# Altium PCB Potencia.PcbDoc
Units mm, origin at the board's own origin, x right, y up, seen from the top; angles counter-clockwise.
Board outline 100 x 100 mm, 2 copper layers (Top Layer, Bottom Layer); 126 components, 44 nets, 306 pads, 42 vias.
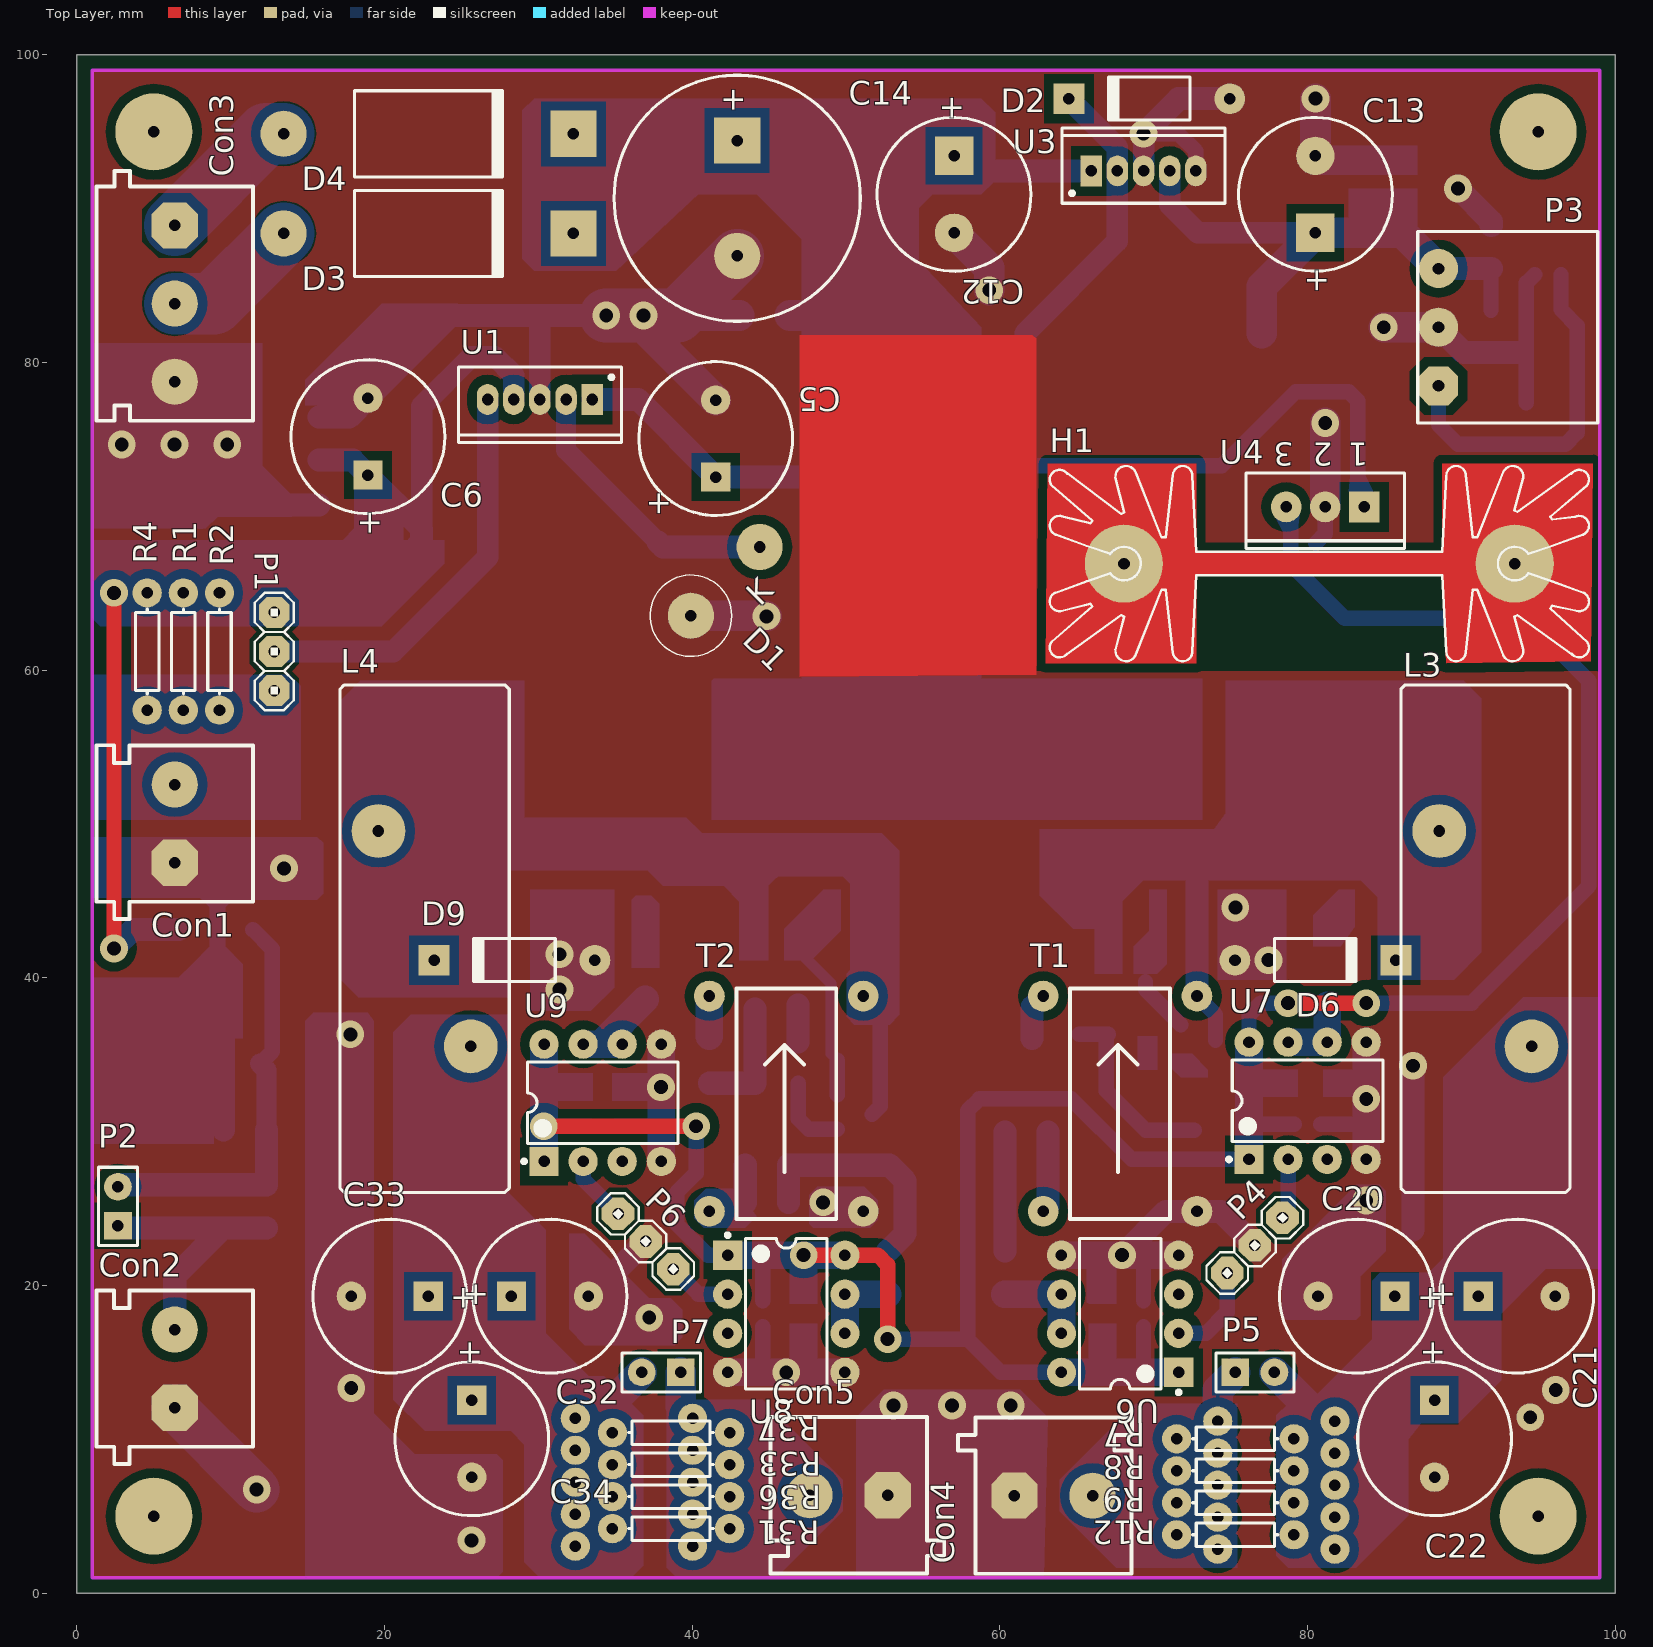
[diagram p0: Top Layer view]
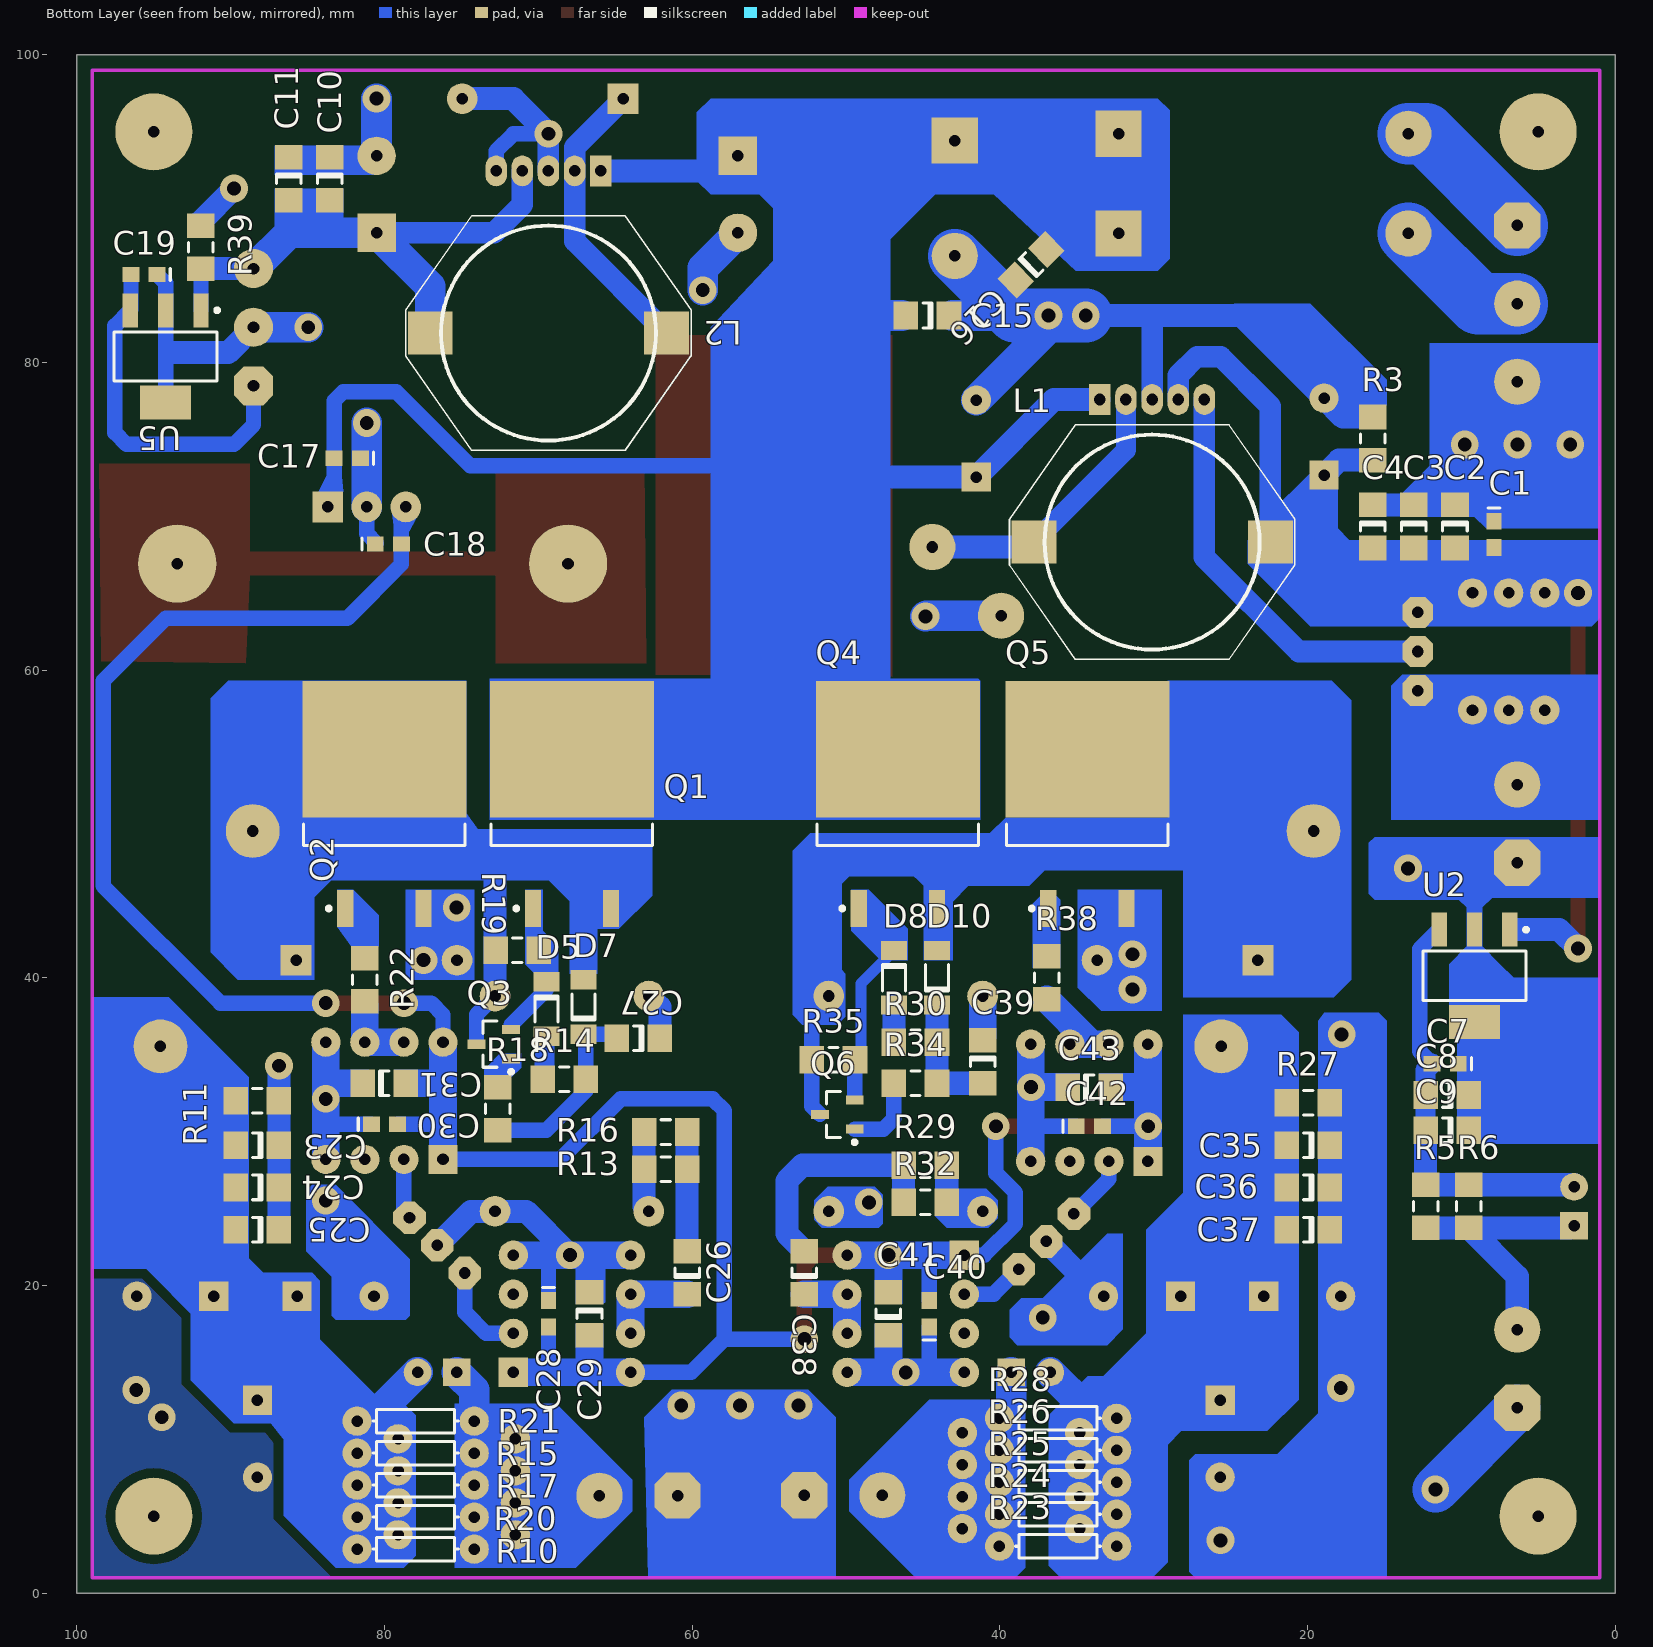
[diagram p1: Bottom Layer view, seen from below]

## Layer stack, top to bottom
Top Solder: solder mask 0.0102, Solder Resist, Dk 3.5
Top Layer: signal copper 0.0356
Dielectric 1: dielectric 0.32, FR-4, Dk 4.8
Bottom Layer: signal copper 0.0356
Bottom Solder: solder mask 0.0102, Solder Resist, Dk 3.5

## Board outline
0,0 100,0 100,100 0,100

## Design rules (kind name [scope] priority, off if disabled: settings)
Clearance "Polygon Clearance" [InPolygon AND (Not(OnLayer('Keep-Out Layer'))) vs All AND (Not(OnLayer('Keep-Out Layer')))] p1: gap=0.6
Clearance [All AND (Not(OnLayer('Keep-Out Layer'))) vs All AND (Not(OnLayer('Keep-Out Layer')))] p2: gap=0.3
ComponentClearance [All] p1 off: gap=0.5 collisioncheckmode=3 verticalgap=0.254 showdistances=TRUE
Height [All] p1: minheight=0 maxheight=80 prefheight=12.7
MinimumSolderMaskSliver SilkscreenOverComponentPads [All] p2: minsoldermaskwidth=0.254
PlaneConnect [All] p1: planeconnectstyle=Relief reliefexpansion=0.508 reliefentries=4 reliefconductorwidth=0.7 reliefairgap=0.6
PolygonConnect [All] p1: connectstyle=Direct reliefconductorwidth=1 reliefentries=4 polygonreliefangle="90 Angle" airgapwidth=0.254
RoomDefinition "5V and 3V3 Outputs" [InComponentClass('5V and 3V3 Outputs')] p1: confinementstyle=ConfineIn formatcopy=TRUE lockcomponents=FALSE outline 1,1 14.478,1 14.478,60.579 46.736,60.579 46.736,80.518 12.446,80.518 12.446,73.025 1,73.025
RoomDefinition "Variable Output 2" [InComponentClass('Variable Output 2')] p2: confinementstyle=ConfineIn formatcopy=TRUE lockcomponents=FALSE outline 14.877,1 56.66,1 56.66,80.645 46.99,80.645 46.99,60.071 14.877,60.071
RoomDefinition "Variable Output 1" [InComponentClass('Variable Output 1')] p3: confinementstyle=ConfineIn formatcopy=TRUE lockcomponents=FALSE outline 56.896,1 99,1 99,59.944 58.928,59.944 58.928,80.645 56.896,80.645
RoomDefinition Regulators [InComponentClass('Regulators')] p4: confinementstyle=ConfineIn formatcopy=TRUE lockcomponents=FALSE outline 0.889,99.187 99,99.187 99,60.198 59.309,60.198 59.309,80.832 12.065,80.832 12.065,73.237 0.889,73.237
RoutingVias [All] p1: holewidth=0.75 width=1.5 viastyle="Through Hole" minholewidth=0.75 minwidth=1.5 maxholewidth=1.25 maxwidth=3
SolderMaskExpansion [All] p1: expansion=0.102
Width [All] p1: maxlimit=8 minlimit=0.5 preferedwidth=1
27 further rules are at their usual default settings.

## Classes and differential pairs
component class "5V and 3V3 Outputs": C1 C2 C3 C4 C5 C6 C7 C8 C9 Con1 Con2 D1 L1 P1 P2 R1 R2 R3 R4 R5 R6 U1 U2
component class Regulators: C10 C11 C12 C13 C14 C15 C16 C17 C18 C19 Con3 D2 D3 D4 H1 L2 P3 R39 U3 U4 U5
component class "Variable Output 1": C20 C21 C22 C23 C24 C25 C26 C27 C28 C29 C30 C31 Con4 D5 D6 D7 L3 P4 P5 Q1 Q2 Q3 R7 R8 R9 R10 R11 R12 R13 R14 R15 R16 R17 R18 R19 R20 R21 R22 T1 U6 U7
component class "Variable Output 2": C32 C33 C34 C35 C36 C37 C38 C39 C40 C41 C42 C43 Con5 D8 D9 D10 L4 P6 P7 Q4 Q5 Q6 R23 R24 R25 R26 R27 R28 R29 R30 R31 R32 R33 R34 R35 R36 R37 R38 T2 U8 U9

## Components (designator, comment, footprint, x,y, rotation, side; value= is the part's Value field where it differs from the comment)
C1 "C0603" 0603 7.874,68.834 r270 bottom
C2 "SMD" 1206 10.414,69.342 r270 bottom
C3 "SMD" 1206 13.081,69.342 r270 bottom
C4 "SMD" 1206 15.748,69.342 r270 bottom
C5 "220uF" CAPPR5-10X16#1 41.529,75.057 r90 top
C6 "470uF HF" CAPPR5-10X20#1 18.923,75.184 r90 top
C7 "C0603" 0603 11.049,34.417 r0 bottom
C8 "SMD" 1206 10.922,32.385 r0 bottom
C9 "SMD" 1206 10.922,30.099 r0 bottom
C10 "SMD" 1206 83.566,91.948 r270 bottom
C11 "SMD" 1206 86.233,91.948 r270 bottom
C12 "220uF" CAPPR5-10X16#2 57.023,90.932 r270 top
C13 "470uF HF" CAPPR5-10X20#2 80.518,90.932 r90 top
C14 "2200uF" CAPPR7.5-16X35.5 42.926,90.678 r270 top
C15 "SMD" 1206 44.704,83.058 r0 bottom
C16 "SMD" 1206 37.973,86.36 r135 bottom
C17 "C0603" 0603 82.423,73.787 r0 bottom
C18 "C0603" 0603 79.756,68.199 r180 bottom
C19 "C0603" 0603 95.631,85.725 r0 bottom
C20 "50V" CAPPR5-10X20#1 83.185,19.304 r180 top
C21 "50V" CAPPR5-10X20#1 93.599,19.304 r0 top
C22 "50V" CAPPR5-10X20#1 88.265,10.033 r270 top
C23 "SMD" 1206 88.265,29.125 r0 bottom
C24 "SMD" 1206 88.265,26.374 r0 bottom
C25 "SMD" 1206 88.265,23.622 r0 bottom
C26 "SMD" 1206 60.325,20.828 r90 bottom
C27 "SMD" 1206 63.5,36.068 r0 bottom
C28 "C0603" 0603 69.342,18.161 r270 bottom
C29 "SMD" 1206 66.675,18.161 r270 bottom
C30 "C0603" 0603 80.01,30.48 r180 bottom
C31 "SMD" 1206 80.01,33.147 r180 bottom
C32 "50V" CAPPR5-10X20#1 30.752,19.304 r0 top
C33 "50V" CAPPR5-10X20#1 20.338,19.304 r180 top
C34 "50V" CAPPR5-10X20#1 25.672,10.033 r270 top
C35 "SMD" 1206 19.957,29.125 r0 bottom
C36 "SMD" 1206 19.957,26.374 r0 bottom
C37 "SMD" 1206 19.957,23.622 r0 bottom
C38 "SMD" 1206 52.705,20.828 r90 bottom
C39 "SMD" 1206 41.119,34.544 r270 bottom
C40 "C0603" 0603 44.595,18.161 r90 bottom
C41 "SMD" 1206 47.262,18.161 r90 bottom
C42 "C0603" 0603 34.181,30.353 r180 bottom
C43 "SMD" 1206 34.181,32.893 r180 bottom
Con1 "Salida Buck" My_CN2 1.27,44.958 r90 top
Con2 "Salida Buck" My_CN2 1.27,9.525 r90 top
Con3 "AC Input" My_CN3 11.455,91.44 r270 top
Con4 "Salida Buck" My_CN2 58.42,11.43 r0 top
Con5 "Salida Buck" My_CN2 55.245,1.27 r180 top
D1 "1N5822" "Vertical DO-201AD" 41.91,65.532 r45 top
D2 "1N5817" DO-41 69.723,97.155 r180 top
D3 "1N5408" DO-201AD 22.86,88.392 r0 top
D4 "1N5408" DO-201AD 22.86,94.869 r0 top
D5 "1N4148" SOD80C 69.469,37.973 r90 bottom
D6 "1N4937" DO-41 80.518,41.148 r0 top
D7 "1N4148" SOD80C 67.056,38.1 r270 bottom
D8 "1N4148" SOD80C 46.881,40.005 r90 bottom
D9 "1N4937" DO-41 28.448,41.148 r180 top
D10 "1N4148" SOD80C 44.087,40.005 r270 bottom
H1 "Heat sink TO22" My_Heat_sink_TO22 80.772,66.167 r180 top
L1 "SMTDR1206" "SMTDR1206 Inductor" 30.099,68.326 r180 bottom
L2 "SMTDR1206" "SMTDR1206 Inductor" 69.342,81.915 r0 bottom
L3 "Inductor" "R33x19x11 Toroid Vertical" 91.567,42.545 r270 top
L4 "Inductor" "R33x19x11 Toroid Vertical" 22.606,42.545 r270 top
P1 "Header 3" My_1X03 12.827,61.214 r90 top
P2 "Header 2" HDR1X2 2.667,23.876 r90 top
P3 "XY2500R-F 3P" "XY2500R-F 3P" 88.519,82.296 r90 top
P4 "Header 3" My_1X03 76.581,22.606 r45 top
P5 "Header 2" HDR1X2 75.311,14.351 r0 top
P6 "Header 3" My_1X03 36.975,22.86 r135 top
P7 "Header 2" HDR1X2 39.261,14.351 r180 top
Q1 "IRF540NS" D2PAK_N 67.818,51.308 r90 bottom
Q2 "IRF540NS" D2PAK_N 80.01,51.308 r90 bottom
Q3 "BC807-25" SOT-23A_N 72.898,35.687 r0 bottom
Q4 "IRF540NS" D2PAK_N 46.627,51.308 r90 bottom
Q5 "IRF540NS" D2PAK_N 34.308,51.308 r90 bottom
Q6 "BC807-25" SOT-23A_N 50.564,31.115 r0 bottom
R1 "Carbon" AXIAL-0.3 6.921,61.214 r270 top
R2 "Carbon" AXIAL-0.3 9.271,61.214 r270 top
R3 "SMD" 8RB-1206 15.748,75.057 r270 bottom
R4 "Carbon" AXIAL-0.3 4.572,61.214 r270 top
R5 "SMD" 8RB-1206 12.319,25.146 r270 bottom
R6 "SMD" 8RB-1206 9.525,25.146 r270 bottom
R7 "Carbon" AXIAL-0.3 75.311,10.033 r180 top
R8 "Carbon" AXIAL-0.3 75.311,7.953 r180 top
R9 "Carbon" AXIAL-0.3 75.311,5.874 r180 top
R10 "Carbon" AXIAL-0.3 77.978,2.857 r180 bottom
R11 "SMD" 8RB-1206 88.265,32.004 r0 bottom
R12 "Carbon" AXIAL-0.3 75.311,3.794 r180 top
R13 "SMD 1206" 8RB-1206 61.722,27.559 r0 bottom
R14 "SMD 1206" 8RB-1206 68.326,33.401 r0 bottom
R15 "Carbon" AXIAL-0.3 77.978,9.096 r180 bottom
R16 "SMD 1206" 8RB-1206 61.722,29.972 r0 bottom
R17 "Carbon" AXIAL-0.3 77.978,7.017 r180 bottom
R18 "SMD" 8RB-1206 72.644,31.496 r270 bottom
R19 "SMD" 8RB-1206 71.374,41.783 r180 bottom
R20 "Carbon" AXIAL-0.3 77.978,4.937 r180 bottom
R21 "Carbon" AXIAL-0.3 77.978,11.176 r180 bottom
R22 "SMD 1206" 8RB-1206 81.28,39.878 r270 bottom
R23 "Carbon" AXIAL-0.3 36.213,3.048 r0 bottom
R24 "Carbon" AXIAL-0.3 36.213,5.128 r0 bottom
R25 "Carbon" AXIAL-0.3 36.213,7.207 r0 bottom
R26 "Carbon" AXIAL-0.3 36.213,9.287 r0 bottom
R27 "SMD" 8RB-1206 19.957,31.877 r0 bottom
R28 "Carbon" AXIAL-0.3 36.213,11.367 r0 bottom
R29 "SMD 1206" 8RB-1206 44.849,27.813 r180 bottom
R30 "SMD 1206" 8RB-1206 45.484,35.814 r0 bottom
R31 "Carbon" AXIAL-0.3 38.626,4.191 r0 top
R32 "SMD 1206" 8RB-1206 44.849,25.4 r180 bottom
R33 "Carbon" AXIAL-0.3 38.626,8.35 r0 top
R34 "SMD" 8RB-1206 45.484,33.147 r180 bottom
R35 "SMD" 8RB-1206 50.818,34.671 r180 bottom
R36 "Carbon" AXIAL-0.3 38.626,6.271 r0 top
R37 "Carbon" AXIAL-0.3 38.626,10.43 r0 top
R38 "SMD 1206" 8RB-1206 36.957,40.005 r270 bottom
R39 "SMD" 8RB-1206 91.948,87.503 r270 bottom
T1 "Gate Driver Transformer 15mm Toroidal" "Gate Driver Transformer 15mm Toroidal" 67.662,31.242 r90 top
T2 "Gate Driver Transformer 15mm Toroidal" "Gate Driver Transformer 15mm Toroidal" 45.963,31.242 r90 top
U1 "LM2576T-5.0" T05A 30.099,77.597 r180 top
U2 "TC1262-3.3VDB" SOT-223-DB3_N 9.144,40.132 r270 bottom
U3 "LM2575T-5.0" T05A 69.342,92.456 r0 top
U4 "MC7815ACT" 221A-04 81.153,70.612 r180 top
U5 "TC1262-3.3VDB" SOT-223-DB3_N 94.234,80.391 r270 bottom
U6 "MCP1407-E/P" PDIP300-P8 67.818,18.161 r180 top
U7 "MCP1407-E/P" PDIP300-P8 80.01,32.004 r90 top
U8 "MCP1407-E/P" PDIP300-P8 46.119,18.161 r0 top
U9 "MCP1407-E/P" PDIP300-P8 34.181,31.877 r90 top

## Footprints (in the part's own frame and the unit in brackets; to place one, negate y for a bottom-side part, rotate by r counter-clockwise, add the part's x,y. Pads: shape width x height; smd on the part's side, far side on the other; paste and mask are expansions set on the pad)
8RB-1206 [mm] "Chip Resistor; Body 3.2 x 1.6 mm (LxW typ)"
  rect 1.6x1.8 smd: 1(-1.4,0) 2(1.4,0)
  silkscreen extent -0.3,-0.8 0.3,0.8
221A-04 [mm] "TO, Thru-Hole, Vertical, Heatsink Mounted; 3 In-Line Leads; Pitch 2.54 mm"
  rect 2x2 hole 0.75: 1(-2.54,0)
  round 2 hole 0.75: 2(0,0) 3(2.54,0)
  silkscreen extent -5.15,-2.2 5.15,2.7
0603 [mm] "Chip Capacitor; Body 1.6 x 0.8 mm (LxW typ)"
  rect 1.1x1 smd: 1(-0.85,0) 2(0.85,0)
  silkscreen extent -1.7,-0.4 -1.7,0.4
1206 [mm] "Chip Capacitor; Body 3.2 x 1.6 mm (LxW typ)"
  rect 1.6x1.8 smd: 1(-1.4,0) 2(1.4,0)
  silkscreen extent -0.3,-0.8 0.3,0.8
AXIAL-0.3 [mm] "Axial Device, Thru-Hole; 2 Leads; 0.3 in Pin Spacing"
  round 1.9 hole 0.75: 1(-3.81,0) 2(3.81,0)
  silkscreen extent -2.77,-0.76 2.77,0.76
CAPPR5-10X16#1 [mm] "Capacitor, Electrolytic, Radial; Body 10 x 16 mm (Dia.xH typ); Pin Spacing 5 mm (typ)"
  rect 1.9x1.9 hole 0.75: 1(-2.5,0)
  round 1.9 hole 0.75: 2(2.5,0)
  silkscreen extent -5,-5 5,5
CAPPR5-10X16#2 [mm] "Capacitor, Electrolytic, Radial; Body 10 x 16 mm (Dia.xH typ); Pin Spacing 5 mm (typ)"
  rect 2.5x2.5 hole 0.75: 1(-2.5,0)
  round 2.5 hole 0.75: 2(2.5,0)
  silkscreen extent -5,-5 5,5
CAPPR5-10X20#1 [mm] "Capacitor, Electrolytic, Radial; Body 10 x 20 mm (Dia.xH typ); Pin Spacing 5 mm (typ)"
  rect 1.9x1.9 hole 0.75: 1(-2.5,0)
  round 1.9 hole 0.75: 2(2.5,0)
  silkscreen extent -5,-5 5,5
CAPPR5-10X20#2 [mm] "Capacitor, Electrolytic, Radial; Body 10 x 20 mm (Dia.xH typ); Pin Spacing 5 mm (typ)"
  rect 2.5x2.5 hole 0.75: 1(-2.5,0)
  round 2.5 hole 0.75: 2(2.5,0)
  silkscreen extent -5,-5 5,5
CAPPR7.5-16X35.5 [mm] "Capacitor, Electrolytic, Radial; Body 16 x 35.5 mm (Dia.xH typ); Pin Spacing 7.5 mm (typ)"
  rect 3x3 hole 0.75: 1(-3.75,0)
  round 3 hole 0.75: 2(3.75,0)
  silkscreen extent -8,-8 8,8
D2PAK_N [mm] "D2-PAK, 4-Leads, Body 8.8x10.4mm, Pitch 2.54mm, Lead Span 15.1mm, IPC Medium Density"
  rect 2.4x1.05 smd: 1(-6.8,2.54) 3(-6.8,-2.54)
  rect 8.9x10.65 smd: 2(3.55,0)
  silkscreen extent -6.92,-5.25 -1.3,5.25, body extent -2.7,-5.28 6.3,5.28, height 4.69
DO-41 [mm] "Diode, Axial; Body 5.2 x 2.7 mm (LxDia. max), Lead Dia. 0.86 mm (max)"
  round 2 hole 0.75: 1(-5.23,0)
  rect 2x2 hole 0.75: 2(5.23,0)
  silkscreen extent -2.65,-1.4 2.75,1.4
DO-201AD [mm] "Diode, Axial; Body 9.5 x 5.6 mm (LxDia. max), Lead Dia. 1.32 mm (max)"
  round 3 hole 0.75: 1(-9.42,0)
  rect 3x3 hole 0.75: 2(9.42,0)
  silkscreen extent -4.8,-2.8 4.9,2.8
"Gate Driver Transformer 15mm Toroidal" [mm] "Gate Driver Transformer 15mm Toroidal"
  round 2 hole 0.75: 1(-6.424,4.844) 2(-6.424,-5.156) 3(7.576,4.844) 4(7.576,-5.156)
  silkscreen extent -6.92,-3.41 8.08,3.09
HDR1X2 [mm] "Connector; Header; 2 Position"
  rect 1.8x1.8 hole 0.75: 1(0,0)
  round 1.8 hole 0.75: 2(2.54,0)
  silkscreen extent -1.27,-1.27 3.81,1.27
My_1X03 [mm]
  oct 2x2 hole 0.75: 1(-2.54,0) 2(0,0) 3(2.54,0)
  silkscreen extent -3.81,-1.27 3.81,1.27
My_CN2 [mm]
  oct 3x3 hole 0.75: 1(2.527,-5.093)
  round 3 hole 0.75: 2(7.607,-5.093)
  silkscreen extent -1.14,-10.17 10.16,-0.01
My_CN3 [mm]
  oct 3x3 hole 0.75: 1(2.527,-5.093)
  round 3 hole 0.75: 2(7.607,-5.093) 3(12.687,-5.093)
  silkscreen extent -1.02,-10.17 15.23,-0.01
My_Heat_sink_TO22 [mm]
  round 5.08 hole 0.75: A2,5(-12.7,-0.762) B2,5(12.7,-0.762)
  Top Layer region: 17.78,5.715 8.001,5.715 8.001,0 -8.001,0 -8.255,5.715 -17.653,5.588 -17.78,-7.239 -8.001,-7.239 -8.001,-1.524 8.001,-1.524 8.001,-7.239 17.653,-7.239
  silkscreen extent -17.53,-7.11 17.53,5.59
PDIP300-P8 [mm] "DIP, 8-Leads, Row Spacing 7.62mm, Pitch 2.54mm, Body 9.5x6.6mm"
  rect 1.9x1.9 hole 0.75: 1(-3.81,3.81)
  round 1.9 hole 0.75: 2(-3.81,1.27) 3(-3.81,-1.27) 4(-3.81,-3.81) 5(3.81,-3.81) 6(3.81,-1.27) 7(3.81,1.27) 8(3.81,3.81)
  silkscreen extent -3.94,-4.9 2.65,5.23, body extent -3.55,-4.9 3.55,4.9, height 5.34
"R33x19x11 Toroid Vertical" [mm] "R33x19x11 Toroid Vertical"
  round 3.5 hole 0.75: 1(-7,-3) 2(7,3)
  silkscreen extent -16.5,-5.5 16.5,5.5
"SMTDR1206 Inductor" [mm] "SMTDR1206 Inductor"
  rect 2.92x2.79 smd: 1(-7.685,0) 2(7.685,0)
  silkscreen extent -9.27,-7.62 9.27,7.62
SOD80C [mm] "Metal Electrode Face (MELF) Diode; Body 3.5 x 1.6 mm (LxDia)"
  rect 1.25x1.7 smd: 1(-1.775,0) 2(1.775,0)
  silkscreen extent -0.85,-0.75 0.85,0.75
SOT-23A_N [mm] "SOT23, 3-Leads, Body 2.9x1.3mm, Pitch 0.95mm, Lead Span 2.3mm, IPC Medium Density"
  rect 1.15x0.6 smd: 1(-1.125,0.95) 2(-1.125,-0.95) 3(1.125,0)
  silkscreen extent -1.25,-1.5 0.7,1.92, body extent -0.7,-1.5 0.7,1.5, height 1.09
SOT-223-DB3_N [mm] "SOT223, 4-Leads, Body 6.5x3.5mm, Pitch 2.3mm, Lead Span 7mm, IPC Medium Density"
  rect 2.2x1 smd: 1(-3,2.3) 2(-3,0) 3(-3,-2.3)
  rect 2.2x3.3 smd: 4(3,0)
  silkscreen extent -3.12,-3.35 1.6,3.47, body extent -1.85,-3.35 1.85,3.35, height 1.8
T05A [mm] "TO, Thru-Hole, Vertical, Heatsink Mounted; 5 In-Line Leads; Pitch 1.70 mm"
  rect 1.4x2 hole 0.75: 1(-3.4,0)
  oval 1.4x2 hole 0.75: 2(-1.7,0) 3(0,0) 4(1.7,0) 5(3.4,0)
  silkscreen extent -5.3,-2.1 5.3,2.8, body extent -5.35,-2.15 5.35,2.85, height 19.6
"Vertical DO-201AD" [mm] "Vertical DO-201AD"
  round 3 hole 0.75: 1(-2.816,0) 2(3.5,0)
  silkscreen extent -5.47,-2.65 -0.17,2.65
"XY2500R-F 3P" [mm] "XY2500R-F 3P"
  oct 2.54x2.54 hole 0.75: 1(-3.81,0)
  round 2.54 hole 0.75: 2(0,0) 3(3.81,0)
  silkscreen extent -6.21,-10.35 6.21,1.35

## Part data
C1 C7 C17 C18 C19 C28 C30 C40 C42: "C1608X7R1C105K X7R"
C2 C3 C4 C8 C9 C10 C11 C15 C16 C23 C24 C25 C26 C27 C29 C31 C35 C36 C37 C38 C39 C41 C43: library part C1206, "Ceramic Chip Capacitor - Standard"
C5 C12: library part EKA00DD322J00, "Aluminum Electrolytic Capacitor, Radial Style with Long Leads: 220uF, 63V"
C6 C13: library part EKC00DE347E00, "Aluminum Electrolytic Capacitor, Radial Style with Long Leads: 470uF, 25V"
C14: library part EKA00JL422H00, "Aluminum Electrolytic Capacitor, Radial Style with Long Leads: 2200uF, 50V"
C20 C21 C22 C32 C33 C34: library part EKB00DE347H00, "Aluminum Electrolytic Capacitor, Radial Style with Long Leads: 470uF, 50V"
Con1 Con2 Con4 Con5: library part "CON2 pin blue", "Connector blue screw"
Con3: library part "CON3 pin Green", "Connector green screw"
D1: library part "Generic Schottky Diode", "Generic Schottky Diode"
D2: library part 1N6095, "Schottky Rectifier"
D3 D4: library part "Diode 1N5408", "3 Amp Medium Power Silicon Rectifier Diode"
D5 D7 D8 D10: "High Conductance Fast Diode"
D6 D9: library part "Diode 1N4001", "1 Amp General Purpose Rectifier"
H1: "Heat sink for TO22"
L1 L2: library part "100UHY SMD 18.54X7.11MM 20% 3A 0.19E SMTDR1206-101M", "100UHY SMD 18.54X7.11MM 20% 3A 0.19E SMTDR1206-101M"
L3 L4: library part "Generic Inductor", "Generic Inductor"
P1 P4 P6: "Header, 3-Pin"
P2 P5 P7: "Header, 2-Pin"
P3: "HEADER 3P P/CI 90gra VERDE P=3.81MM XY2500R-F"
Q1 Q2 Q4 Q5: "HEXFET Power MOSFET"
Q3 Q6: "PNP General Purpose Amplifier"
R1 R2 R4 R7 R8 R9 R10 R12 R15 R17 R20 R21 R23 R24 R25 R26 R28 R31 R33 R36 R37: library part Res1, "Resistor"
R3 R5 R6 R11 R13 R14 R16 R18 R19 R22 R27 R29 R30 R32 R34 R35 R38 R39: library part ERJ8BQ, "Low Ohmic Value Thick Film Chip Resistor, 0.22 Ohm to 9.1 Ohm Range, 1%, 2% and 5% Tolerance, 1206 Size, 0.33 W"
U1: "SIMPLE SWITCHER® 3A Step-Down Voltage Regulator, 5-pin TO-220"
U2 U5: "500mA Fixed Output CMOS LDO, 3-Pin SOT-223, Extended Temperature"
U3: "SIMPLE SWITCHER® 1A Step-Down Voltage Regulator, 5-pin TO-220"
U4: "3-Terminal Positive Fixed Voltage Regulator"
U6 U7 U8 U9: "6A High-Speed Power MOSFET Drivers, Non Inverting, Extended Temperature"

## Free pads (board coordinates)
  round 5 hole 0.75: 0(5,5) 0(5,95) 0(95,5) 0(95,95)

## Via types
v1: diameter 1.8, hole 0.9, Top Layer to Bottom Layer, 42 vias

## Nets (pads, with @x,y where several pads share a name; then routed paths per layer and width w, separated by ;. In a path a pad name is that pad's centre, name@x,y a point inside that pad or via, vN(x,y) a via of type N, cw(c..) or ccw(c..) an arc to the next point about the centre after c; other vN are vias at no path point)
3V3_SENSE_NEG: Con2.2 P2.1 R5.2 R6.2 | length 17.7
  Bottom Layer w1.5: P2.1@2.667,24.003 2.924,23.746 R6.2 ; Con2.2 6.363,20.584 R6.2 ; R5.2 R6.2
3V3_SENSE_POS: C7.2 C8.2 C9.2 P2.2 R5.1 R6.1 U2.3 | length 27.3
  Bottom Layer w1: U2.3 12.7,41.876 12.7,35.218 C7.2
  Bottom Layer w1.3: C7.2 12.322,33.994 C8.2 C9.2
  Bottom Layer w1.5: P2.2@2.667,26.543 2.67,26.546 R6.1 R5.1 12.322,26.549 C9.2
5V_CTRL: P1.2 U1.5 | length 26.7
  Bottom Layer w1.4: P1.2 20.574,61.214 26.699,67.339 U1.5
5V_SENSE_NEG: Con1.2 P1.1 R1.2 R2.2 R4.2
5V_SENSE_POS: C1.2 C2.2 C3.2 C4.2 C6.1 L1.2 P1.3 R1.1 R2.1 R3.2 R4.1 U1.4 U2.1 | length 55
  Top Layer w1: v1(2.413,41.91) v1(2.413,65.024)
  Bottom Layer w1.4: L1.2@22.414,69.193 22.414,77.151 25.654,80.391 27.178,80.391 28.399,79.17 U1.4
  Bottom Layer w1.5: v1(2.413,41.91) 3.635,43.132 U2.1@6.604,43.132 ; R3.2 17.95,73.657 C6.1 22.414,69.193 L1.2 L1.2@22.072,67.984
+3V3: C19.2 P3.1 U5.3 | length 23
  Bottom Layer w1: P3.1 88.519,75.946 89.789,74.676 96.774,74.676 97.536,75.438 97.536,82.389 U5.3 ; U5.3@96.481,83.444 C19.2
+5V: C10.2 C11.2 C13.1 L2.2 P3.3 R39.2 U3.4 U5.1 | length 36.3
  Bottom Layer w1: U5.1 R39.2@91.934,86.089
  Bottom Layer w1.4: U3.4 71.042,90.248 72.858,88.432 C13.1@80.01,88.432 ; C13.1@79.97,88.392 C13.1@80.01,88.432 ; C13.1 C13.1@80.01,88.432 ; C13.1@80.518,88.94 C13.1@80.01,88.432
  Bottom Layer w1.5: P3.3@88.522,86.103 R39.2
  Bottom Layer w2: L2.2 77.027,84.941 C13.1 86.193,88.432 P3.3
+15V: C18.2 C28.2 C29.2 C30.2 C31.2 C40.2 C41.2 C42.2 C43.2 U4.3 U6.1 U6.8 U7.1 U7.8 U8.1 U8.8 U9.1 U9.8 | length 187.5
  Top Layer w1: v1(30.353,30.353) v1(40.259,30.353) ; v1(47.244,21.971) U8.8 52.07,21.971 52.705,21.336 v1(52.705,16.51) ; v1(78.74,38.354) v1(83.82,38.354)
  Bottom Layer w1: v1@30.625,30.353 C42.2 ; v1(40.259,30.353) 40.259,27.305 38.989,26.035 38.989,24.003 41.021,21.971 U8.1 ; C40.2 44.595,21.953 ; v1(52.705,16.51) 57.912,16.51 ; U6.8 60.071,14.351 57.912,16.51 ; 69.342,14.351 C28.2 ; U7.1 68.58,28.194 64.643,32.131 58.674,32.131 57.912,31.369 57.912,16.51 ; U7.8 76.2,37.592 76.962,38.354 v1(78.74,38.354) ; 76.454,30.48 C30.2 ; U4.3 78.906,70.319 C18.2@78.906,68.326 ; C18.2 78.906,66.89 82.423,63.373 94.234,63.373 98.298,59.309 98.298,45.974 90.678,38.354 v1(83.82,38.354)
  Bottom Layer w1.8: U9.1 U9.8 ; U8.1 v1(47.244,21.971) U8.8 ; U6.8 69.342,14.351 U6.1 ; U7.1 U7.8
+30V: C5.1 C12.1 C14.1 C15.2 C16.2 C17.2 D3.2 D4.2 Q1.2 Q4.2 U1.1 U3.1 U4.1 | length 60.1
  Bottom Layer w1: 57.277,73.279 74.422,73.279 79.248,78.105 82.677,78.105 83.273,77.509 C17.2 U4.1@83.273,71.032
  Bottom Layer w1.5: U1.1@33.549,77.597 36.489,77.597 C5.1 47.792,72.557 48.006,72.771 ; 58.674,92.456 U3.1@65.659,92.456
  Bottom Layer w2: C15.2@46.355,83.058 48.133,83.058
GATE1_BUCK1_PIC: P4.1 U6.2 | length 6.3
  Bottom Layer w1: U6.2 73.406,16.891 74.785,18.27 P4.1
GATE1_BUCK2_PIC: P6.1 U8.2 | length 4.2
  Bottom Layer w1: P6.1 40.404,19.431 U8.2
GATE2_BUCK1_PIC: P4.3 U7.2 | length 3.4
  Bottom Layer w1: P4.3@78.74,24.765 U7.2
GATE2_BUCK2_PIC: P6.3 U9.2 | length 4.4
  Bottom Layer w1: U9.2 32.911,26.924 P6.3
GND: C1.1 C2.1 C3.1 C4.1 C5.2 C6.2 C7.1 C8.1 C9.1 C10.1 C11.1 C12.2 C13.2 C14.2 C15.1 C16.1 C17.1 C18.1 C19.1 C20.2 C21.2 C22.2 C23.1 C24.1 C25.1 C28.1 C29.1 C30.1 C31.1 C32.2 C33.2 C34.2 C35.1 C36.1 C37.1 C40.1 C41.1 C42.1 C43.1 Con1.1 Con2.1 Con3.3 Con4.1 Con5.1 D1.1 D2.1 D6.1 D9.1 P3.2 P4.2 P6.2 Q2.3 Q5.3 R3.1 R11.1 R27.1 R39.1 T1.2 T2.2 U1.3 U2.2 U2.4 U3.3 U3.5 U4.2 U5.2 U5.4 U6.4 U6.5 U7.4 U7.5 U8.4 U8.5 U9.4 U9.5 | length 193.7
  Bottom Layer w1: C42.1 37.737,30.353 ; 44.595,14.369 C40.1 ; C28.1 69.342,21.844 ; v1(69.342,94.869) 71.628,94.869 72.742,93.755 U3.5 ; C18.1@80.542,68.263 81.153,68.873 U4.2 ; C30.1 83.693,30.48 ; U5.4 U5.2 94.234,85.178 C19.1
  Bottom Layer w1.4: U1.3 30.099,82.804 ; U3.3 v1(69.342,94.869)
  Bottom Layer w1.5: C1.1@8.034,69.944 8.832,70.742 C2.1 C3.1 C4.1 ; U2.4 9.522,36.754 C8.1 C9.1 ; R3.1 17.696,76.457 C6.2 24.297,83.058 v1(34.417,83.058) ; 34.671,20.574 34.689,20.574 P6.2 ; v1(67.945,21.971) 70.792,24.818 T1.2 74.369,24.818 P4.2 ; v1(69.342,94.869) 71.628,97.155 D2.1 ; C25.1 C24.1 C23.1 R11.1 v1(86.865,34.287) ; P3.2 90.17,80.645 93.726,80.645 ; v1(89.789,91.313) 91.948,89.154 R39.1
  Bottom Layer w1.8: U9.4 U9.5 ; U8.4 U8.5 ; U6.5 v1(67.945,21.971) U6.4 ; U7.4 v1(83.82,32.131) U7.5
  Bottom Layer w2: v1(36.83,83.058) 36.83,82.256 C5.2 ; 39.056,83.058 C15.1@43.053,83.058 ; D1.1 44.79,63.541 v1(44.831,63.5) ; C12.2 59.309,86.146 v1(59.309,84.709) ; C13.2@80.518,93.94 v1(80.518,97.155) ; U4.2 v1(81.153,76.073) ; v1(84.963,82.296) P3.2
  Bottom Layer w3: Con2.1 v1(11.684,6.731)
  Bottom Layer w3.5: v1(34.417,83.058) v1(36.83,83.058) 39.056,83.058 C14.2
  other v1: 25.654,3.429 94.488,11.43 53.086,12.192 56.896,12.192 60.706,12.192 96.139,13.208 17.838,13.335 46.119,14.351 37.211,17.907 48.514,25.4 83.82,25.527 37.973,32.893 17.78,36.322 31.369,39.243 77.47,41.148 31.369,41.529 75.311,44.577 13.462,47.117 2.921,74.676 6.35,74.676 9.779,74.676
NetC26_1: C26.1 U6.6 U6.7 | length 6.2
  Bottom Layer w1.8: C26.1@60.328,19.431 U6.6 U6.7
NetC26_2: C26.2 R13.1 R16.1 | length 7.7
  Bottom Layer w1.5: C26.2 R16.1@60.325,29.969
NetC27_1: C27.1 T1.3 | length 3
  Bottom Layer w1.5: C27.1 62.1,38.1 T1.3
NetC27_2: C27.2 D7.2 R14.1 R18.2 | length 12.2
  Bottom Layer w1: C27.2@65.157,36.325 D7.2 ; D7.2@66.926,36.195 R14.1 66.926,32.642 69.472,30.096 R18.2
NetC38_1: C38.1 U8.6 U8.7 | length 5.3
  Bottom Layer w1.8: U8.6 U8.7 52.702,19.431 C38.1
NetC38_2: C38.2 R29.1 R32.1 | length 15.5
  Bottom Layer w1.5: R32.1 R29.1 52.832,27.813 53.848,26.797 53.848,23.371 C38.2
NetC39_1: C39.1 T2.3 | length 2.6
  Bottom Layer w1.8: C39.1@41.119,36.195 T2.3
NetC39_2: C39.2 D10.2 R30.1 R34.2 | length 7.8
  Bottom Layer w1.5: C39.2@41.122,33.147 R34.2 R30.1 D10.2@44.084,37.973
NetCon3_1: Con3.1 D4.1 | length 9.5
  Bottom Layer w4: Con3.1 12.319,94.869 D4.1
NetCon3_2: Con3.2 D3.1 | length 9
  Bottom Layer w4: Con3.2 8.881,83.833 D3.1
NetD1_2: D1.2 L1.1 U1.2 | length 18.5
  Bottom Layer w1.3: U1.2 31.799,74.311 L1.1
  Bottom Layer w1.5: L1.1 38.103,68.007 D1.2
NetD2_2: D2.2 L2.1 U3.2 | length 19
  Bottom Layer w1.4: L2.1 67.642,87.9 U3.2 67.642,94.006 D2.2
NetD5_1: D5.1 R14.2
NetD5_2: D5.2 Q1.1 Q3.2 R19.2 | length 3.8
  Bottom Layer w1: D5.2 69.469,39.243 71.773,36.939
NetD6_2: D6.2 D7.1 L3.1 Q1.3 Q2.2 Q3.3 R19.1 T1.4 | length 11.9
  Bottom Layer w1: T1.4 74.023,37.613 Q3.3@74.023,35.941
  Bottom Layer w1.5: T1.4 72.818,47.324
NetD8_1: D8.1 R30.2 | length 2.4
  Bottom Layer w1.5: R30.2@46.881,35.817 D8.1
NetD8_2: D8.2 Q4.1 Q6.2 R35.2 | length 10.4
  Bottom Layer w0.7: D8.2 49.022,39.639 49.022,35.067 R35.2
  Bottom Layer w1: 49.439,32.385 R35.2@49.439,34.65
NetD9_2: D9.2 D10.1 L4.1 Q4.3 Q5.2 Q6.3 R35.1 T2.4 | length 6.8
  Bottom Layer w1: Q6.3 52.218,31.644 R35.1 52.218,37.74
NetQ2_1: Q2.1 R22.1
NetQ3_1: Q3.1 R18.1
NetQ5_1: Q5.1 R38.1
NetQ6_1: Q6.1 R34.1 | length 5.1
  Bottom Layer w1: R34.1 46.884,30.84 47.559,30.165 Q6.1
NetR13_2: R13.2 R16.2 T1.1 | length 5.3
  Bottom Layer w1.5: T1.1 63.122,25.122 R13.2 R16.2
NetR22_2: R22.2 U7.6 U7.7 | length 5
  Bottom Layer w1.8: U7.7 U7.6 R22.2@81.28,38.227
NetR29_2: R29.2 R32.2 T2.1 | length 2.4
  Bottom Layer w1.5: R32.2 R29.2
NetR38_2: R38.2 U9.6 U9.7 | length 6.5
  Bottom Layer w1.8: U9.7 U9.6 ; 34.163,35.811 R38.2
OUT1_SENSE_NEG: Con4.2 P5.1 R7.2 R8.2 R9.2 R10.2 R12.2 R15.2 R17.2 R20.2 R21.2 | length 3.6
  Bottom Layer w2: R21.2 74.168,13.208 P5.1
OUT1_SENSE_POS: C20.1 C21.1 C22.1 C23.2 C24.2 C25.2 L3.2 P5.2 R7.1 R8.1 R9.1 R10.1 R11.2 R12.1 R15.1 R17.1 R20.1 R21.1 | length 4
  Bottom Layer w2: P5.2 80.645,11.557
OUT2_SENSE_NEG: Con5.2 P7.1 R23.2 R24.2 R25.2 R26.2 R28.2 R31.2 R33.2 R36.2 R37.2 | length 2.2
  Bottom Layer w2: 39.261,12.128 P7.1
OUT2_SENSE_POS: C32.1 C33.1 C34.1 C35.2 C36.2 C37.2 L4.2 P7.2 R23.1 R24.1 R25.1 R26.1 R27.2 R28.1 R31.1 R33.1 R36.1 R37.1 | length 3.2
  Bottom Layer w2: 34.435,12.065 P7.2
pads on no net: H1.A2,5 H1.B2,5 U6.3 U7.3 U8.3 U9.3

## Polygon pours and split planes (outlines as drawn)
GND on Top Layer "Top Layer-No Net" (solid, remove dead copper, pour order 5): 46.99,60.071 46.99,80.899 12.065,80.899 12.065,73.279 1.016,73.279 1.016,1.016 1,1 14.967,1 14.884,1.082 14.884,60.071
GND on Top Layer "Top Layer-No Net" (solid, remove dead copper, pour order 2): 1,99 99,99 99,60.198 59.309,60.198 59.309,80.899 12.065,80.899 12.065,73.279 1.016,73.279
GND on Top Layer "Top Layer-No Net" (solid, remove dead copper, pour order 3): 46.99,80.645 58.928,80.645 58.928,59.944 98.933,59.944 98.933,1.067 99,1 14.877,1 14.877,60.053 14.859,60.071 46.99,60.071
GND on Bottom Layer "Top Layer-No Net" (solid, remove dead copper, pour order 7): 99,20.447 95.758,20.447 93.599,18.288 93.218,17.907 93.218,15.494 93.218,13.589 91.313,11.684 90.043,10.414 87.757,10.414 87.249,9.779 87.249,7.874 87.249,4.826 83.423,1 99,1

## Keep-outs
Keep-Out Layer:
  lines w0.2: 1,1 1,99 99,99 99,1 1,1

## Other copper
Top Layer:
  region net GND: 62.357,59.69 62.357,81.534 62.103,81.788 46.99,81.788 46.99,59.563
Bottom Layer:
  rectangle net GND: 1,73.279 12.065,81.28
  region net GND: 7.493,40.894 6.604,40.005 1,40.005 1,29.988 1,29.21 8.89,29.21 8.89,40.894
  region net GND: 8.636,44.196 8.636,44.577 8.001,45.212 1,45.212 1,49.149 15.621,49.149 16.002,48.768 16.002,45.466 15.621,45.085 10.16,45.085 9.652,44.577 9.652,44.196
  region net GND: 7.493,36.068 10.795,36.068 10.795,40.894 9.652,42.037 9.652,44.196 8.636,44.196 8.636,42.037 7.493,40.894
  region net GND: 24.765,83.82 19.812,83.82 14.859,78.867 14.859,77.216 17.78,77.216
  region net 5V_SENSE_NEG: 1,59.69 13.843,59.69 14.541,58.991 14.541,54.737 14.541,50.292 12.827,50.292 1.397,50.292 1,50.292
  region net 5V_SENSE_POS: 17.145,68.326 18.161,68.326 18.161,69.342
  region net 5V_SENSE_POS: 18.034,72.644 18.034,68.199 18.161,68.199 21.209,68.199 21.209,70.231
  region net 5V_SENSE_POS: 1,68.453 1,63.389 1.524,62.865 19.812,62.865 23.876,66.929 23.876,68.453
  region net GND: 8.382,69.215 1,69.215 1,73.279 12.065,73.279 13.97,71.374 13.97,69.977 9.144,69.977
  region net +30V: 40.386,97.155 29.718,97.155 28.956,96.393 28.956,86.741 29.718,85.979 35.052,85.979 40.386,90.932
  region net NetQ5_1: 37.846,40.64 37.846,44.831 37.338,45.339 36.322,45.339 36.068,45.085 36.068,40.64
  region net OUT1_SENSE_NEG: 65.024,4.191 67.564,1.651 70.993,1.651 70.993,4.064 71.12,4.191
  region net OUT1_SENSE_NEG: 65.024,8.509 68.834,12.319 70.993,12.319 70.993,8.509
  region net OUT2_SENSE_NEG: 48.641,4.191 45.45,1 44.053,1 47.244,4.191
  region net OUT2_SENSE_NEG: 48.641,8.509 44.577,12.573 43.18,12.573 47.244,8.509
  region net OUT2_SENSE_NEG: 45.466,10.287 43.18,12.573 38.989,12.573 38.354,11.938 38.354,1.635 38.989,1 44.053,1 45.466,2.413
  region net OUT2_SENSE_NEG: 45.466,2.413 47.244,4.191 48.641,4.191 49.784,5.334 49.784,6.35 45.466,6.35
  region net OUT2_SENSE_NEG: 45.466,10.287 47.244,8.509 48.641,8.509 49.784,7.366 49.784,6.35 45.466,6.35
  region net OUT2_SENSE_POS: 28.194,10.541 29.083,9.652 29.083,2.016 30.099,1 36.052,1 36.83,1.778 36.83,11.557 34.29,14.097 33.274,14.097 30.48,16.891
  region net GND: 32.004,23.368 32.004,17.145 33.02,16.129 38.862,16.129 39.37,16.637 39.37,18.415 38.608,19.177 37.211,19.177 33.02,23.368
  region net GND: 18.923,37.719 19.304,37.211 19.304,11.684 21.971,9.017 27.305,9.017 27.686,8.636 27.686,1.381 27.305,1 14.875,1 14.859,1.016 14.859,37.211 15.367,37.719
  region net OUT2_SENSE_POS: 28.067,37.592 21.717,37.592 20.574,36.449 20.574,12.573 22.606,10.541 28.194,10.541 30.48,12.827 30.48,23.622 28.067,26.035
  region net NetR29_2: 40.132,25.527 40.894,26.289 42.799,26.289 44.196,24.511 43.434,23.749 40.767,23.749 40.132,24.384
  region net GND: 47.625,25.908 48.133,26.416 51.181,26.416 52.07,25.527 52.07,24.257 51.562,23.749 47.879,23.749 47.625,24.003
  region net NetD9_2: 42.037,45.974 44.958,45.974 45.974,46.99 44.831,46.99
  region net NetD9_2: 50.038,37.465 50.546,36.957 52.832,36.957 53.467,37.592 53.467,48.26 52.324,49.403 44.577,49.403 44.577,46.609 49.784,46.609 50.292,46.101 50.292,40.513 50.038,40.259
  region net NetD8_2: 49.657,45.72 48.514,45.72 45.974,43.18 45.974,41.148 47.752,41.148 49.657,43.053
  region net NetD9_2: 43.053,44.958 42.037,45.974 38.1,45.974 37.084,46.99 41.783,46.99 43.053,45.72
  region net NetD9_2: 44.958,41.148 44.958,49.022 44.577,49.403 40.64,49.403 39.624,50.419 28.956,50.419 28.067,49.53 28.067,46.99 41.783,46.99 43.053,45.72 43.053,41.148
  region net GND: 34.925,45.72 34.925,39.37 33.401,37.846 29.464,37.846 29.464,45.72
  region net NetD9_2: 29.083,59.309 18.415,59.309 17.145,58.039 17.145,39.878 18.288,38.735 28.067,38.735 28.067,49.53 29.083,50.419
  region net GND: 80.518,94.107 87.122,94.107 87.122,92.202 80.518,92.202
  region net +5V: 82.677,91.313 82.677,89.027 86.741,89.027 87.122,88.646 87.122,91.313
  region net +30V: 41.275,59.309 41.402,59.436 73.152,59.436 73.152,50.292 41.275,50.292
  region net +30V: 58.801,59.055 58.801,82.296 54.737,86.614 54.737,90.043 55.626,90.932 58.801,90.932 59.69,91.821 59.69,96.266 58.801,97.155 47.625,97.155 40.386,97.155 40.386,90.932 44.196,90.932 47.117,88.011 47.117,59.055
  region net +15V: 79.375,32.258 79.375,34.036 76.2,34.036 76.073,33.909 76.073,32.258
  region net GND: 81.026,34.036 83.185,34.036 83.185,32.258 81.026,32.258
  region net +15V: 65.786,17.526 67.564,17.526 67.564,14.732 67.437,14.605 67.31,14.732 65.786,14.732
  region net GND: 67.564,18.796 65.786,18.796 65.659,18.923 65.659,21.971 67.564,21.971
  region net +15V: 46.355,18.796 48.133,18.796 48.133,21.463 46.355,21.463
  region net GND: 46.355,17.526 46.355,14.732 46.482,14.605 48.133,14.605 48.133,17.526
  region net GND: 34.798,33.782 34.798,32.004 38.1,32.004 38.227,32.131 38.227,33.782
  region net +15V: 33.528,33.782 33.528,32.004 30.226,32.004 30.226,33.637 30.371,33.782
  region net NetD6_2: 74.676,59.309 74.676,49.657 62.611,49.657 62.611,45.339 64.77,43.18 66.167,43.18 66.167,40.259 67.945,40.259 67.945,46.355 85.217,46.355 85.217,59.309
  region net NetD6_2: 85.217,46.355 88.519,46.355 88.773,46.355 91.313,48.895 91.313,50.165 88.646,52.832 85.217,52.832
  region net NetD6_2: 84.582,39.878 89.535,39.878 89.535,48.768 89.281,48.514 84.582,48.514
  region net NetQ2_1: 80.391,42.037 80.391,44.069 82.042,45.72 83.058,45.72 83.058,43.307 82.169,42.037
  region net GND: 74.168,39.878 78.613,39.878 78.613,45.72 74.168,45.72
  region net NetQ3_1: 71.12,34.163 71.755,33.528 73.533,33.528 73.533,34.036 72.517,35.052 71.12,35.052
  region net NetD5_2: 68.707,40.259 70.231,40.259 70.866,40.894 70.866,45.72 69.723,45.72 69.723,43.053 68.707,42.037
  region net NetD5_1: 68.961,34.036 68.961,36.195 70.231,36.195 70.231,34.036
  region net OUT1_SENSE_POS: 84.201,20.32 84.709,20.828 88.646,20.828 89.535,21.209 92.583,21.336 92.583,13.843 89.789,11.049 86.487,11.049 84.201,13.589
  region net OUT1_SENSE_POS: 88.837,21.082 88.837,33.528 94.044,38.735 99,38.735 99,21.082
  region net OUT1_SENSE_POS: 88.9,21.844 89.535,21.844 89.535,20.574 87.63,20.574
  region net OUT1_SENSE_POS: 92.075,21.082 95.504,21.082 92.202,17.78 92.075,17.78
  region net OUT1_SENSE_POS: 77.978,2.413 78.74,1.651 83.185,1.651 83.185,12.319 78.74,12.319 77.978,11.557
  region net OUT1_SENSE_POS: 80.01,12.319 84.201,16.51 84.201,20.32 84.709,20.828 86.551,19.368 86.551,12.319 86.55,5.016 83.185,1.651 80.01,1.651
  region net OUT1_SENSE_POS: 86.487,9.906 86.487,11.176 87.503,11.176
  region net OUT1_SENSE_NEG: 70.231,2.413 70.993,1.651 75.438,1.651 75.438,12.319 70.993,12.319 70.231,11.557
  region net OUT1_SENSE_NEG: 70.231,2.413 68.453,4.191 65.024,4.191 63.881,5.334 63.881,6.35 70.231,6.35
  region net OUT1_SENSE_NEG: 70.231,10.287 68.453,8.509 65.024,8.509 63.881,7.366 63.881,6.35 70.231,6.35
  region net NetD6_2: 91.313,50.165 91.313,58.166 90.17,59.309 84.963,59.309 84.963,52.705
  region net GND: 50.673,11.43 50.673,1 62.865,1 63.119,11.43
  region net GND: 50.673,11.43 63.119,11.43 61.341,13.208 52.451,13.208
  region net NetD6_2: 91.313,49.149 91.313,41.656 89.535,39.878 89.535,47.371
  region net NetD6_2: 67.754,44.767 67.754,46.926 69.913,46.926
  region net NetD6_2: 85.153,44.64 85.153,47.053 82.74,47.053
  region net NetD6_2: 73.85,49.53 74.739,49.53 74.739,50.8
  region net GND: 78.613,17.78 83.185,17.78 83.439,18.034 83.439,20.574 85.09,22.225 85.09,26.162 84.709,26.543 83.185,26.543 78.359,21.717 78.359,18.034

## Dimensions
1,1 to 1,99 on Mechanical 1
1,1 to 99,1 on Mechanical 1

## Text inside footprints (layer, text, board x,y; h text height)
C5: Top Overlay "+" at 38.481,69.977 h1.5 r90
C6: Top Overlay "+" at 19.673,68.709 h1.5 r90
C12: Top Overlay "+" at 56.273,97.407 h1.5 r270
C13: Top Overlay "+" at 81.268,84.457 h1.5 r90
C14: Top Overlay "+" at 42.037,97.917 h1.5 r270
C20: Top Overlay "+" at 89.66,20.054 h1.5 r180
C21: Top Overlay "+" at 87.124,18.554 h1.5
C22: Top Overlay "+" at 87.515,16.508 h1.5 r270
C32: Top Overlay "+" at 24.277,18.554 h1.5
C33: Top Overlay "+" at 26.813,20.054 h1.5 r180
C34: Top Overlay "+" at 24.922,16.508 h1.5 r270
D1: Top Overlay "K" at 44.424,64.095 h1.52 r45
H1: Mechanical 2 "2,5" at 69.342,69.977 h1.27 r180; Mechanical 2 "2,5" at 95.377,69.977 h1.27 r180
U4: Top Overlay "3" at 79.113,74.787 h1.5 r180; Top Overlay "2" at 81.653,74.787 h1.5 r180; Top Overlay "1" at 83.943,74.787 h1.5 r180